# Altium PCB L298N_Motor_Driver.PcbDoc
Units mm, origin at the board's own origin, x right, y up, seen from the top; angles counter-clockwise.
Board outline 47.4 x 55.37 mm, 2 copper layers (Top Layer, Bottom Layer), stack 1.581 mm thick; 21 components, 15 nets, 63 pads, 12 vias.
Unrouted connection lines stored in the file: 11.
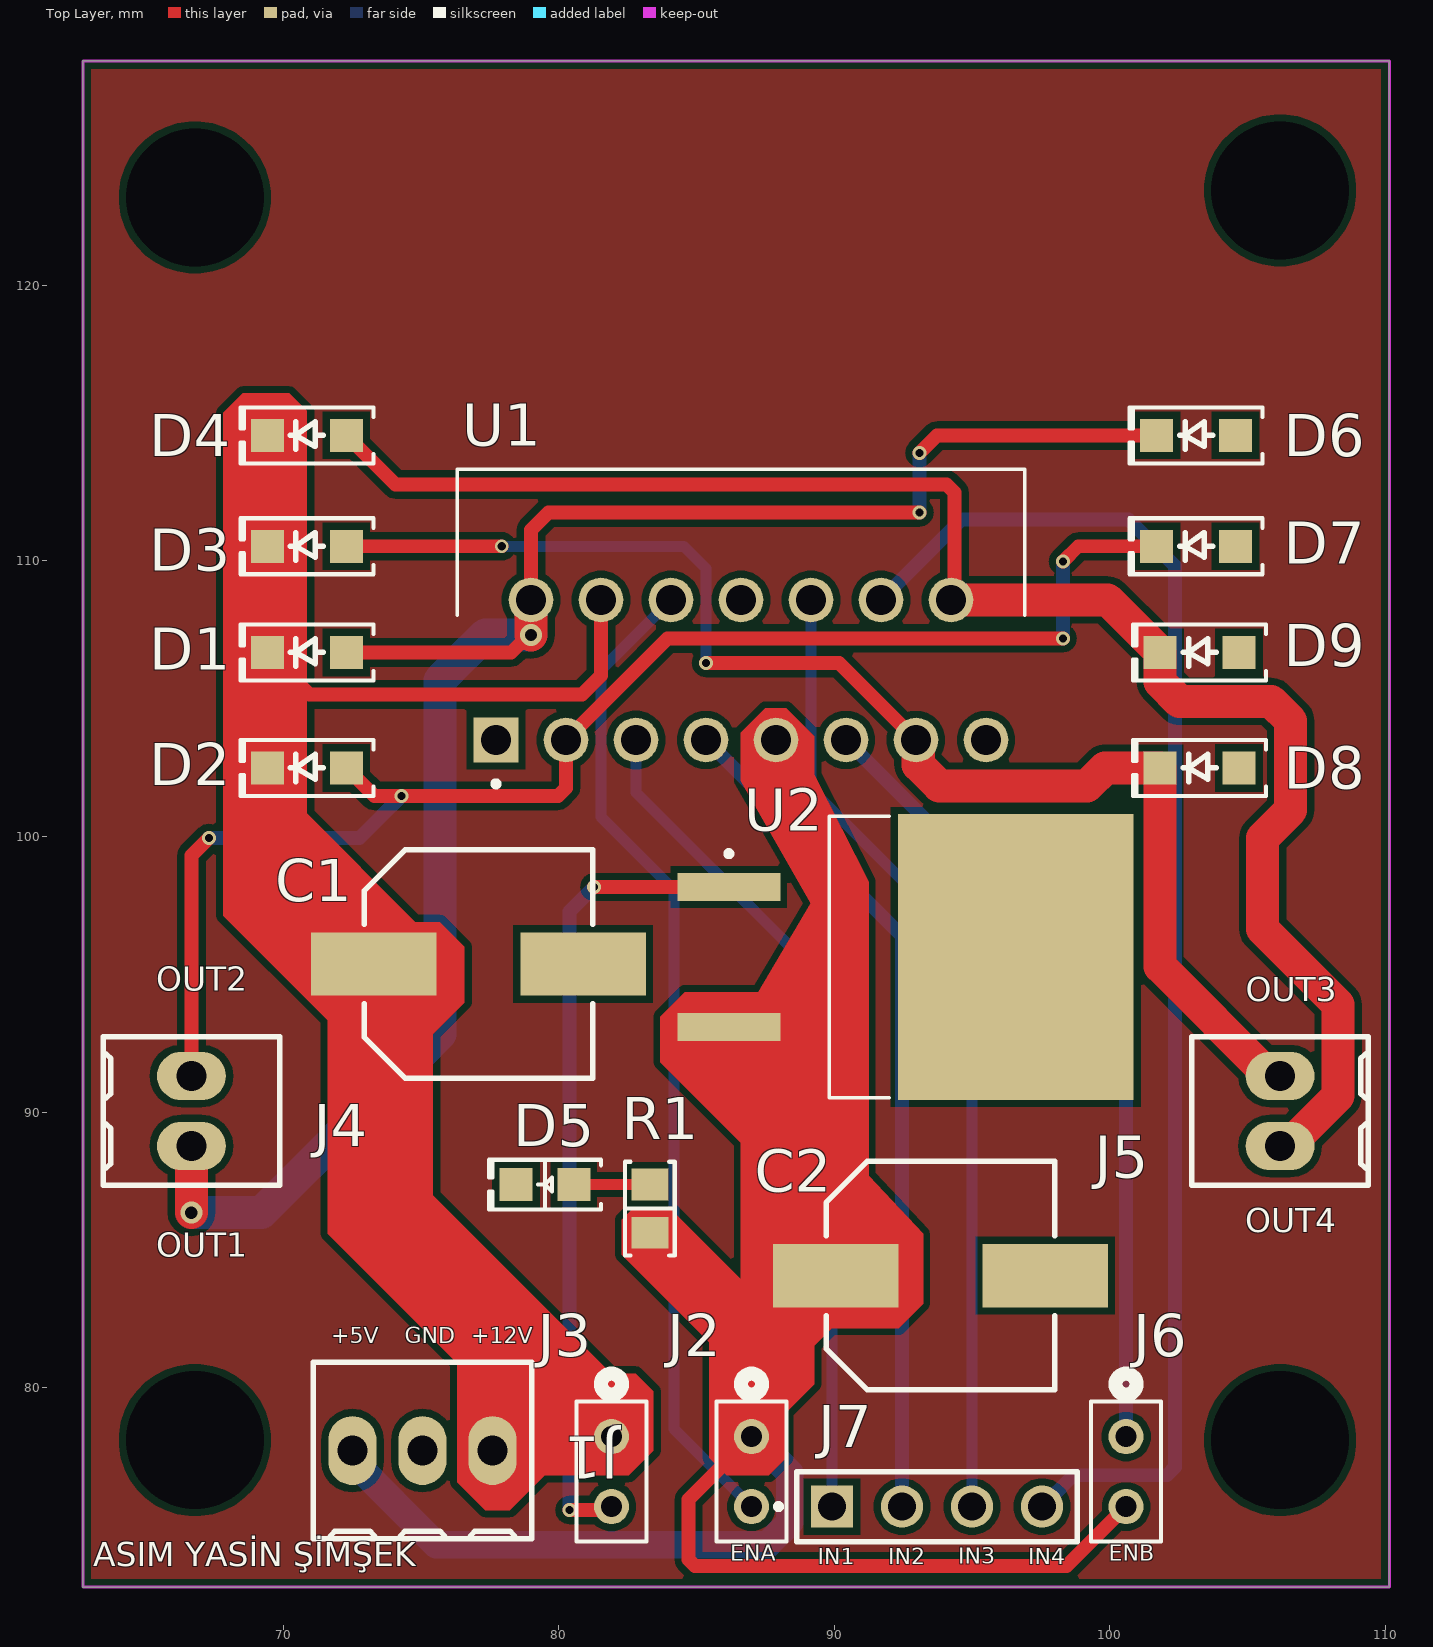
[diagram p0: Top Layer view]
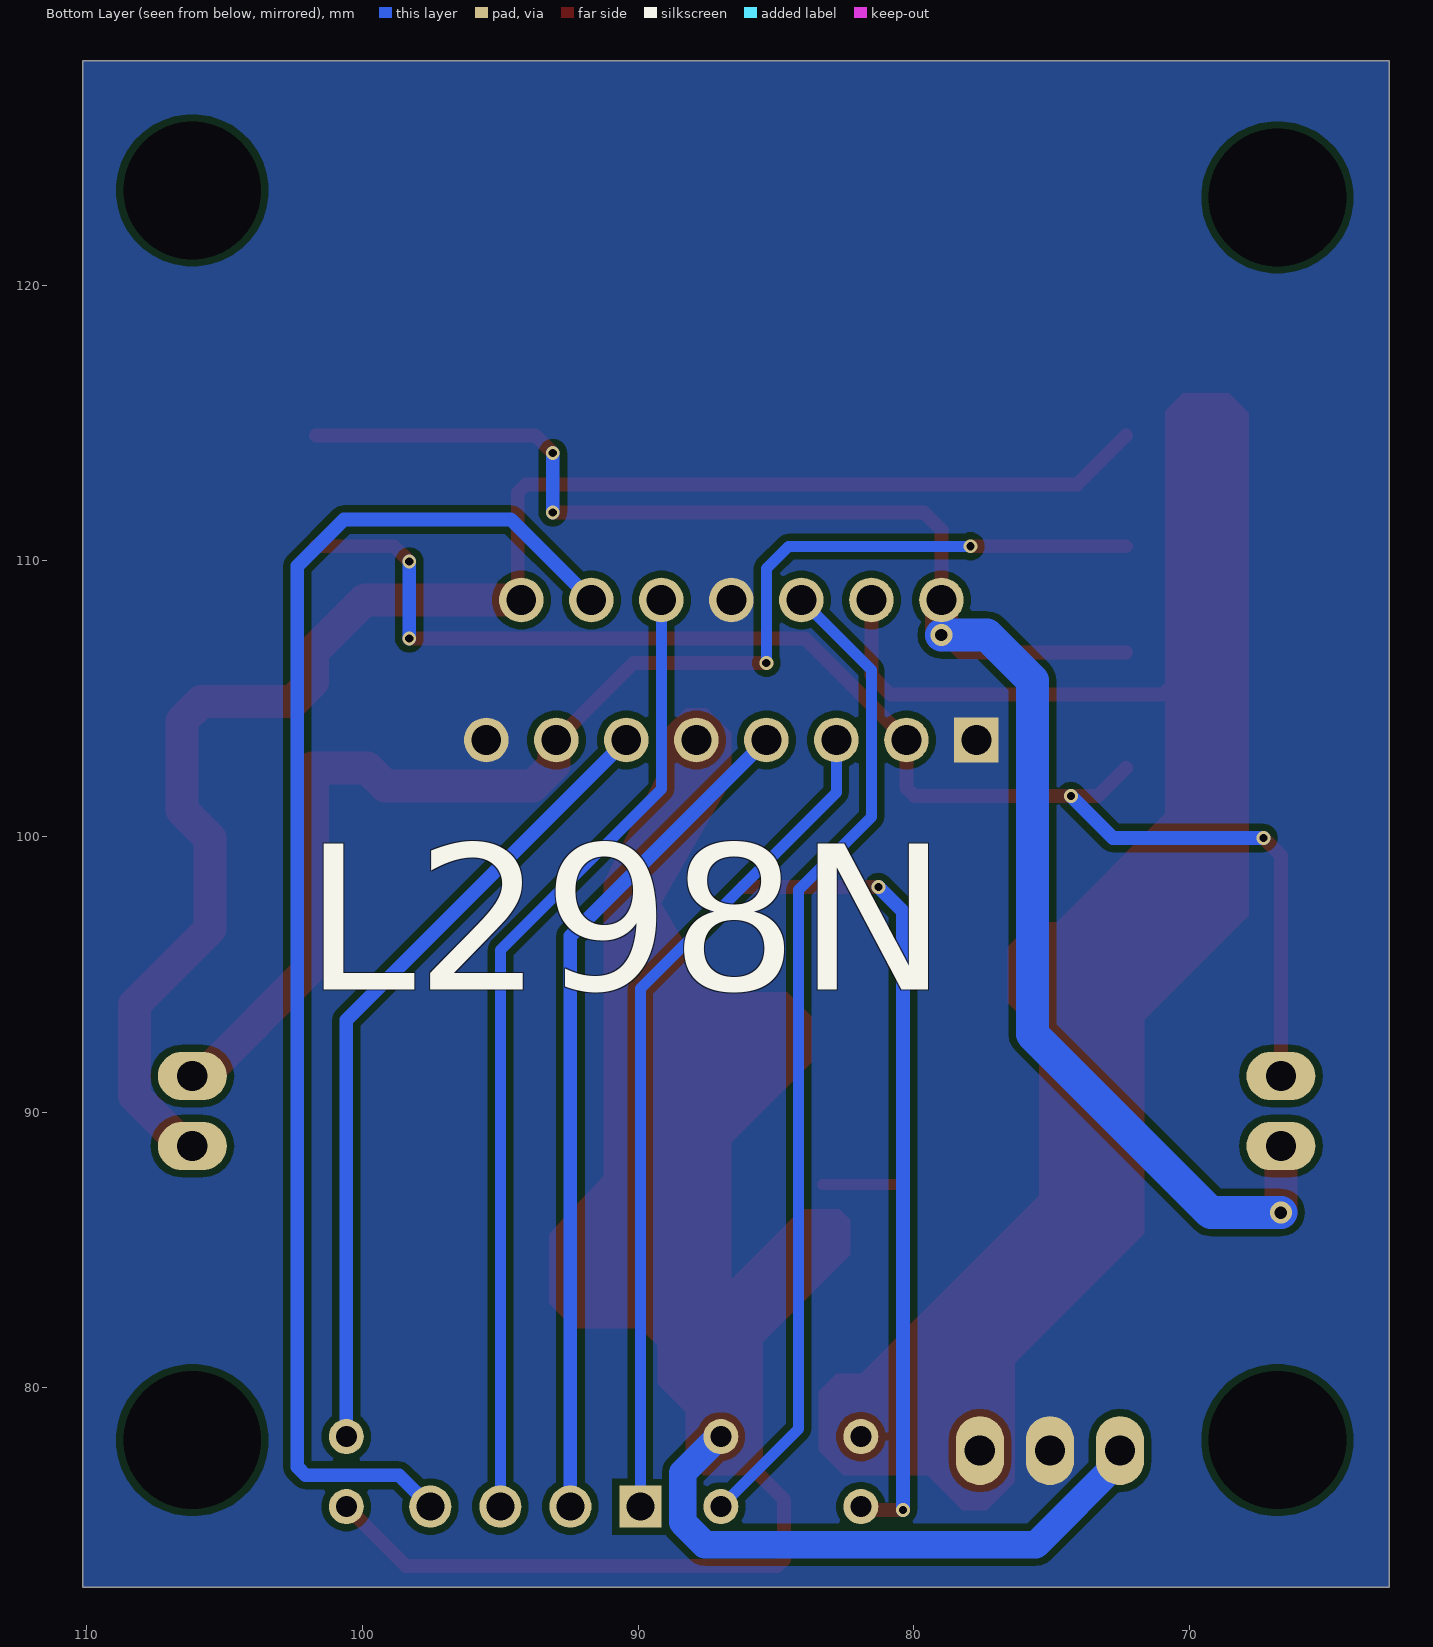
[diagram p1: Bottom Layer view, seen from below]
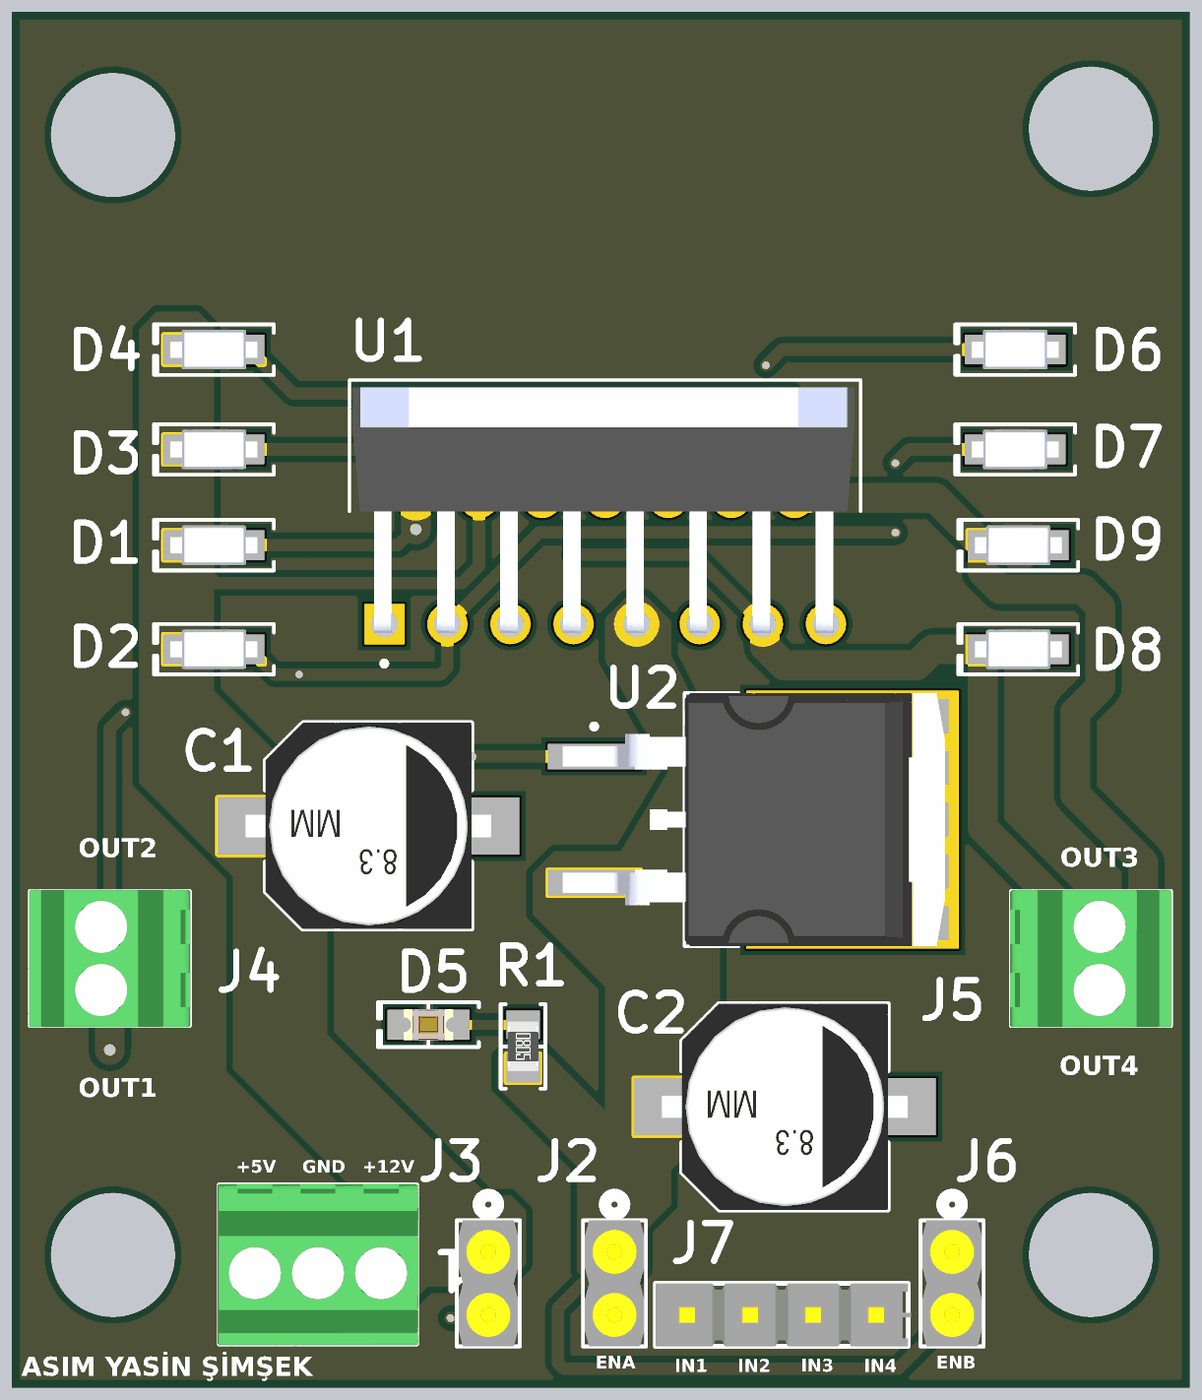
[diagram p2: 3D render of the assembled board from above, using the file's embedded part models]

## Layer stack, top to bottom
Top Solder: solder mask 0.0102, Solder Resist, Dk 3.5
Top Layer: signal copper 0.0356
Dielectric 1: dielectric 1.51, FR-4, Dk 4.8
Bottom Layer: signal copper 0.0356
Bottom Solder: solder mask 0.0102, Solder Resist, Dk 3.5

## Board outline
62.738,72.771 62.738,128.143 110.141,128.143 110.141,72.771

## Design rules (kind name [scope] priority, off if disabled: settings)
Clearance [All] p1: gap=0.254 ignorepadtopadclearanceinfootprint=FALSE except(0: Arc-Hole Track-Hole SMDPad-Hole THPad-Hole Via-Hole Fill-Hole Poly-Hole Region-Hole Text-Hole)
PolygonConnect [All] p1: connectstyle=Direct reliefconductorwidth=0.254 reliefentries=4 polygonreliefangle="90 Angle" airgapwidth=0.254
RoutingVias [All] p1: holewidth=0.5 width=0.8 viastyle="Through Hole" minholewidth=0.3 minwidth=0.5 maxholewidth=1 maxwidth=2
SolderMaskExpansion [All] p1: expansion=0.102 istentingtop=FALSE
Width [All] p1: maxlimit=3 minlimit=0.152 preferedwidth=0.5
30 further rules are at their usual default settings.

## Components (designator, comment, footprint, x,y, rotation, side; value= is the part's Value field where it differs from the comment)
C1 "220µF" "CAP ALSMD 8.3MM H10.5MM" 77.089,95.377 r0 top
C2 "220µF" "CAP ALSMD 8.3MM H10.5MM" 93.853,84.074 r0 top
D1 "1N4007FLTR" SOD123F 70.866,106.68 r180 top
D2 "1N4007FLTR" SOD123F 70.866,102.489 r180 top
D3 "1N4007FLTR" SOD123F 70.866,110.532 r180 top
D4 "1N4007FLTR" SOD123F 70.866,114.554 r180 top
D5 "Red" "LED 0805_2012 RED" 79.502,87.376 r180 top
D6 "1N4007FLTR" SOD123F 103.124,114.554 r180 top
D7 "1N4007FLTR" SOD123F 103.124,110.532 r180 top
D8 "1N4007FLTR" SOD123F 103.251,102.489 r180 top
D9 "1N4007FLTR" SOD123F 103.251,106.68 r180 top
J1 "POWER" "TE 282834-3" 75.057,77.724 r180 top
J2 "ENA" "Header 2 PIN" 86.995,75.692 r180 top
J3 "Header 2 PIN" "Header 2 PIN" 81.915,75.692 r180 top
J4 "MOTOR_A" "TE 282834-2" 66.675,90.043 r90 top
J5 "MOTOR_B" "TE 282834-2" 106.172,90.043 r270 top
J6 "ENB" "Header 2 PIN" 100.584,75.692 r180 top
J7 "Header 4 PIN" "Header 4 PIN" 89.916,75.692 r0 top
R1 "1 kOhms" "RES 0805_2012" 83.312,86.501 r270 top
U1 "L298N" L298N 77.724,103.505 r90 top
U2 "7805" 7805CD2T 92.583,95.631 r0 top

## Footprints (in the part's own frame and the unit in brackets; to place one, negate y for a bottom-side part, rotate by r counter-clockwise, add the part's x,y. Pads: shape width x height; smd on the part's side, far side on the other; paste and mask are expansions set on the pad)
7805CD2T [mm] "Voltage Reg"
  rect 3.74x1.02 smd: 1(-6.41,2.54) 2(-6.41,-2.54)
  rect 8.56x10.37 smd paste-6: 3(4,0)
  silkscreen extent -6.51,-5.1 -0.59,5.1, body extent -7.71,-5.1 7.71,5.1, height 4.6
"CAP ALSMD 8.3MM H10.5MM" [mm] "Aluminum Electrolytic Capacitor, Body 8.30x8.30x10.50mm, IPC Low Density"
  rect 4.55x2.3 smd: 1(-3.8,0) 2(3.8,0)
  silkscreen extent -4.15,-4.15 4.15,4.15, body extent -4.95,-4.15 4.95,4.15, height 10.5
"Header 2 PIN" [mil]
  round 50 hole 30: 1(0,-100) 2(0,0)
  silkscreen extent -50,-190 50,50, body extent -47,-150 47,50, height 326
"Header 4 PIN" [mm]
  rect 1.53x1.53 / inner round 1.53 / far side rect 1.53x1.53 hole 1.02: 1(0,0)
  round 1.53 hole 1.02: 2(2.54,0) 3(5.08,0) 4(7.62,0)
  silkscreen extent -2.04,-1.27 8.89,1.27, body extent -1.27,-1.27 9.02,1.27, height 8.38
L298N [mm] "Motor Driver"
  rect 1.62x1.62 hole 1.08: 1(0,0)
  round 1.62 hole 1.08: 2(5.08,-1.27) 3(0,-2.54) 4(5.08,-3.81) 5(0,-5.08) 6(5.08,-6.35) 7(0,-7.62) 8(5.08,-8.89) 9(0,-10.16) 10(5.08,-11.43) 11(0,-12.7) 12(5.08,-13.97) 13(0,-15.24) 14(5.08,-16.51) 15(0,-17.78)
  silkscreen extent -1.69,-19.18 9.83,1.4, body extent -0.36,-18.93 9.53,1.27, height 20.55
"LED 0805_2012 RED" [mm] "Chip Diode, 2-Leads, Body 2.00x1.25mm, IPC Medium Density"
  rect 1.2x1.2 smd: 1(-1.05,0) 2(1.05,0)
  silkscreen extent -2.03,-0.9 2.03,0.9, body extent -1,-0.62 1,0.63, height 0.9
"RES 0805_2012" [mm] "Chip Resistor, 2-Leads, Body 2.00x1.25mm, IPC Medium Density"
  rect 1.15x1.35 smd: 1(-0.875,0) 2(0.875,0)
  silkscreen extent -1.7,-0.9 1.7,0.9, body extent -1,-0.62 1,0.63, height 0.6
SOD123F [mm] "SODFL, 2-Leads, Body 1.60x3.50mm, IPC Medium Density"
  rect 1.2x1.2 smd: 1(-1.43,0) 2(1.43,0)
  silkscreen extent -2.41,-1.02 2.41,1.02, body extent -1.75,-0.8 1.75,0.8, height 1.1
"TE 282834-2" [mm]
  oval 1.75x2.5 hole 1.1: 1(-1.27,0) 2(1.27,0)
  silkscreen extent -2.7,-3.2 2.7,3.2, body extent -2.77,-3.25 2.77,3.25, height 10
"TE 282834-3" [mm]
  oval 1.75x2.5 hole 1.1: 1(-2.54,0) 2(0,0) 3(2.54,0)
  silkscreen extent -3.97,-3.2 3.97,3.2, body extent -4.04,-3.25 4.04,3.25, height 10

## Part data
C1 C2: library part UUR1V221MNL6GS, "CAP ALUM 220UF 20% 35V SMD", Device Package="Radial, Can - SMD", Lifetime @ Temp.="2000 Hrs @ 85°C", manufacturer=Nichicon, Operating Temperature="-40°C ~ 85°C", Ripple Current @ High Frequency="319.8mA @ 10kHz", Ripple Current @ Low Frequency="246mA @ 120Hz", Supplier Part Number 1=493-6238-1-ND, Tolerance=±20%, Voltage - Rated=35V, Applications="General Purpose", Capacitance=220µF, componentlink1description=Datasheet, componentlink1url=http://nichicon-us.com/english/products/pdfs/e-uur.pdf, componentlink2description="DigiKey Link", componentlink2url=http://digikey.com/product-detail/en/nichicon/UUR1V221MNL6GS/493-6238-1-ND/3438751, Height - Seated (Max)="0.413\" (10.50mm)", lastupdated="2.09.2020 01:25:15", Lifecycle Status=Active, Minimum Order=1, Mounting Type="Surface Mount", Package / Case="Radial, Can - SMD", packaging=TapeAndReel, Part Number=UUR1V221MNL6GS, Part Status=Active, partid=7568, price=0.20, series=UUR, Size / Dimension="0.315\" Dia (8.00mm)", Supplier 1=DigiKey, Surface Mount Land Size="0.327\" L x 0.327\" W (8.30mm x 8.30mm)"
D1 D2 D3 D4 D6 D7 D8 D9: "STANDARD RECTIFIER 1000V SOD-123", Capacitance @ Vr, F="15pF @ 4V, 1MHz", Current - Average Rectified (Io)=1A, Current - Reverse Leakage @ Vr="5µA @ 1000V", manufacturer="SMC Diode Solutions", Package / Case=SOD-123F, Supplier Device Package=SOD-123FL, Supplier Part Number 1=1655-1N4007FLCT-ND, Voltage - DC Reverse (Vr) (Max)=1000V, Voltage - Forward (Vf) (Max) @ If="1.1V @ 1A", componentlink1description=Datasheet, componentlink1url=http://www.smc-diodes.com/propdf/1N4001FL-1N4007FL%20N1646%20REV.A.pdf, componentlink2description="DigiKey Link", componentlink2url=http://digikey.com/product-detail/en/smc-diode-solutions/1N4007FLTR/1655-1N4007FLCT-ND/11657827, Diode Type=Standard, lastupdated="30.08.2020 20:59:55", Lifecycle Status=Active, Minimum Order=1, Mounting Type="Surface Mount", packaging=TapeAndReel, Part Number=1N4007FLTR, partid=3314, price=0.01, Speed="Standard Recovery >500ns, > 200mA (Io)", Supplier 1=DigiKey
D5: library part XZMDK54W-4, "LED RED CLEAR 0805 SMD", Current - Test=20mA, Device Package="0805 (2012 Metric)", Lens Color=Colorless, manufacturer=SunLED, Millicandela Rating=228mcd, Supplier Device Package=0805, Supplier Part Number 1=1497-XZMDK54W-4CT-ND, Voltage - Forward (Vf) (Typ)=1.95V, Color=Red, componentlink1description=Datasheet, componentlink1url=https://www.sunledusa.com/products/spec/XZMDK54W-4.pdf, componentlink2description="DigiKey Link", componentlink2url=https://www.digikey.com/en/products/detail/sunled/XZMDK54W-4/13559300, Height (Max)=0.50mm, lastupdated="3.06.2024 20:00:05", Lens Size="1.30mm x 1.25mm", Lens Style="Rectangle with Flat Top", Lens Transparency=Clear, Lifecycle Status=Active, Minimum Order=1, Mounting Type="Surface Mount", Package / Case="0805 (2012 Metric)", packaging=TapeAndReel, Part Number=XZMDK54W-4, Part Status=Active, partid=1067, price=0.05, series=-, Size / Dimension="2.00mm L x 1.25mm W", Supplier 1=DigiKey, Viewing Angle=140°, Wavelength - Dominant=630nm, Wavelength - Peak=645nm
J1: library part 282834-3, "TERM BLK 3P SIDE ENT 2.54MM PCB", Color=Green, Current=10A, manufacturer="TE Connectivity AMP Connectors", Supplier Part Number 1=A98334-ND, Voltage=150V, componentlink1description=Datasheet, componentlink1url=https://www.te.com/commerce/DocumentDelivery/DDEController?Action=srchrtrv&DocNm=282834&DocType=Customer+Drawing&DocLang=English, componentlink2description="DigiKey Link", componentlink2url=http://digikey.com/product-detail/en/te-connectivity-amp-connectors/282834-3/A98334-ND/1153264, lastupdated="15.01.2020 04:15:50", Lifecycle Status=Active, Mating Orientation="Horizontal with Board", Minimum Order=1, Mounting Type="Through Hole", Number of Levels=1, packaging=Bulk, Part Number=282834-3, Part Status=Active, Pitch="0.100\" (2.54mm)", Positions Per Level=3, price=2.01, series=Buchanan, Supplier 1=DigiKey, Wire Gauge="16-30 AWG", Wire Termination="Screw - Rising Cage Clamp"
J2 J6: library part "Header 2 PIN"
J4 J5: library part 282834-2, "TERM BLK 2P SIDE ENT 2.54MM PCB", Color=Green, Current=10A, manufacturer="TE Connectivity AMP Connectors", Supplier Part Number 1=A98333-ND, Voltage=150V, componentlink1description=Datasheet, componentlink1url=https://www.te.com/commerce/DocumentDelivery/DDEController?Action=srchrtrv&DocNm=282834&DocType=Customer+Drawing&DocLang=English, componentlink2description="DigiKey Link", componentlink2url=http://digikey.com/product-detail/en/te-connectivity-amp-connectors/282834-2/A98333-ND/1150135, lastupdated="15.01.2020 04:15:38", Lifecycle Status=Active, Mating Orientation="Horizontal with Board", Minimum Order=1, Mounting Type="Through Hole", Number of Levels=1, packaging=Bulk, Part Number=282834-2, Part Status=Active, Pitch="0.100\" (2.54mm)", Positions Per Level=2, price=0.88, series=Buchanan, Supplier 1=DigiKey, Wire Gauge="16-30 AWG", Wire Termination="Screw - Rising Cage Clamp"
R1: library part Y40821K00000T9W, "RES SMD 1K OHM 0.01% 1/5W 0805", Device Package="0805 (2012 Metric)", manufacturer="Vishay Foil Resistors (Division of Vishay Precision Group)", Operating Temperature="-55°C ~ 225°C", Power (Watts)="0.2W, 1/5W", Supplier Device Package=0805, Supplier Part Number 1=804-1156-ND, Temperature Coefficient=±2.5ppm/°C, Tolerance=±0.01%, componentlink1description=Datasheet, componentlink1url=http://www.vishaypg.com/docs/63263/FRSG-Series.pdf, componentlink2description="DigiKey Link", componentlink2url=https://www.digikey.com/en/products/detail/vishay-foil-resistors-division-of-vishay-precision-group/Y40821K00000T9W/6561129, Composition="Metal Foil", Features="Moisture Resistant, Non-Inductive", Height - Seated (Max)="0.025\" (0.64mm)", lastupdated="8.02.2024 21:02:07", Lifecycle Status=Active, Minimum Order=1, Number of Terminations=2, Package / Case="0805 (2012 Metric)", packaging=Tray, Part Number=Y40821K00000T9W, Part Status=Active, partid=34938, price=15.78, Resistance="1 kOhms", series=FRSG, Size / Dimension="0.080\" L x 0.050\" W (2.03mm x 1.27mm)", Supplier 1=DigiKey
U1: "Motor Driver"
U2: "Voltage Reg."

## Free pads (board coordinates)
  round 4 hole 5 unplated mask+0.05: ""(66.802,78.105) ""(66.802,123.19) ""(106.172,78.105) ""(106.172,123.444)

## Via types
v1: diameter 0.5, hole 0.3, Top Layer to Bottom Layer, tented both sides, 10 vias
v2: diameter 0.8, hole 0.45, Top Layer to Bottom Layer, tented both sides, 2 vias

## Nets (pads, with @x,y where several pads share a name; then routed paths per layer and width w, separated by ;. In a path a pad name is that pad's centre, name@x,y a point inside that pad or via, vN(x,y) a via of type N, cw(c..) or ccw(c..) an arc to the next point about the centre after c; other vN are vias at no path point)
GND: C1.2 C2.2 D5.2 D6.1 D7.1 D8.1 D9.1 J1.2 U1.1 U1.8 U1.15 U2.3
NetC1_1: C1.1 D1.2 D2.2 D3.2 D4.2 J1.1 J3.1 U1.4 | length 15.8
  Top Layer w0.5: D1.2 70.96,105.156 80.849,105.156 81.534,105.841 U1.4
NetC2_1: C2.1 J1.3 J2.1 J6.2 R1.2 U1.9 U2.2 | length 43.9
  Top Layer w0.5: J2.1 84.709,75.946 84.709,73.767 84.943,73.533 98.425,73.533 J6.2
  Bottom Layer w1: J1.3 72.517,77.349 75.563,74.303 87.57,74.303 88.384,75.117 88.384,76.916 87.068,78.232 J2.1
NetD1_1: D1.1 D6.2 J4.1 U1.2 | length 67.1
  Top Layer w0.5: D1.1 78.278,106.68 78.913,107.315 v2(78.994,107.315) ; U1.2 78.994,111.125 79.629,111.76 v1(93.091,111.76) ; v1(93.091,113.919) 93.726,114.554 D6.2
  Top Layer w1.2: v2(66.675,86.36) J4.1 ; v2(78.994,107.315) U1.2
  Bottom Layer w0.5: v1(93.091,111.76) v1(93.091,113.919)
  Bottom Layer w1.2: v2(66.675,86.36) 69.215,86.36 75.692,92.837 75.692,105.664 77.343,107.315 v2(78.994,107.315)
NetD2_1: D2.1 D7.2 J4.2 U1.3 | length 52.7
  Top Layer w0.5: J4.2 66.675,99.314 v1(67.31,99.949) ; D2.1 73.312,101.473 v1(74.295,101.473) 79.971,101.473 80.264,101.766 U1.3 83.947,107.188 v1(98.298,107.188) ; v1(98.298,109.982) 98.848,110.532 D7.2
  Bottom Layer w0.5: v1(67.31,99.949) 72.771,99.949 v1(74.295,101.473) ; v1(98.298,107.188) v1(98.298,109.982)
NetD3_1: D3.1 D8.2 J5.1 U1.13 | length 49.1
  Top Layer w0.5: D3.1 v1(77.936,110.532) ; v1(85.344,106.299) 90.17,106.299 U1.13
  Top Layer w1.2: U1.13 93.044,103.425 93.044,102.604 93.807,101.841 99.174,101.841 99.822,102.489 D8.2 101.821,95.289 105.797,91.313 J5.1
  Bottom Layer w0.4: v1(77.936,110.532) 84.54,110.532 85.344,109.728 v1(85.344,106.299)
NetD4_1: D4.1 D9.2 J5.2 U1.14 | length 59.7
  Top Layer w0.5: D4.1 74.074,112.776 94.068,112.776 94.361,112.483 94.361,108.712 U1.14
  Top Layer w1.2: U1.14 99.916,108.585 D9.2 101.821,105.605 102.524,104.902 105.85,104.902 106.553,104.199 106.553,100.965 105.537,99.949 105.537,96.642 108.276,93.903 108.276,90.597 106.452,88.773 J5.2
NetD5_1: D5.1 R1.1 | length 2.8
  Top Layer w0.4: D5.1 R1.1
NetJ2_2: J2.2 U1.6 | length 36.2
  Bottom Layer w0.4: U1.6 81.534,106.045 81.534,100.711 84.181,98.064 84.181,78.506 J2.2
NetJ3_2: J3.2 U2.1 | length 29.4
  Top Layer w0.5: v1(80.391,75.565) 81.788,75.565 J3.2 ; v1(81.28,98.171) U2.1
  Bottom Layer w0.5: v1(80.391,75.565) 80.391,97.282 v1(81.28,98.171)
NetJ6_1: J6.1 U1.11 | length 29.5
  Bottom Layer w0.5: U1.11 100.584,93.345 J6.1
NetJ7_1: J7.1 U1.5 | length 30.8
  Bottom Layer w0.4: U1.5 82.804,101.6 89.916,94.488 J7.1
NetJ7_2: J7.2 U1.7 | length 30.8
  Bottom Layer w0.5: U1.7 92.456,96.393 J7.2
NetJ7_3: J7.3 U1.10 | length 35.3
  Bottom Layer w0.4: U1.10 89.154,101.727 94.996,95.885 J7.3
NetJ7_4: J7.4 U1.12 | length 50.7
  Bottom Layer w0.5: U1.12 94.615,111.506 100.672,111.506 102.362,109.816 102.362,77.128 102.065,76.831 98.675,76.831 J7.4

## Polygon pours and split planes (outlines as drawn)
GND on Bottom Layer "GND_L02_P000" (solid, pour order 0): 62.738,128.143 110.141,128.143 110.141,72.771 62.738,72.771
no net on Top Layer "NONET_L01_P002" (solid, pour order 2): 62.738,128.143 110.141,128.143 110.141,72.771 62.738,72.771

## Keep-outs
Top Layer:
  lines w0.1: 62.738,72.771 110.141,72.771 110.141,128.143 62.738,128.143 62.738,93.345 62.738,72.771

## Other copper
Top Layer:
  region net NetC2_1: 82.296,86.106 82.677,86.487 84.074,86.487 86.614,83.947 86.614,79.883 85.471,78.74 85.471,81.661 82.296,84.836
  region net NetC2_1: 87.503,104.648 86.614,103.759 86.614,102.019 89.149,97.576 87.244,94.361 84.582,94.361 83.693,93.472 83.693,91.821 86.614,88.9 86.614,79.883 85.471,78.74 85.471,77.47 86.106,76.835 87.63,76.835 88.265,77.47 88.265,79.121 89.281,80.137 89.281,81.534 89.916,82.169 92.329,82.169 93.218,83.058 93.218,85.598 91.247,87.696 91.247,98.364 89.281,102.235 89.281,103.632 88.265,104.648
  region net NetC1_1: 68.542,116.078 70.231,116.078 70.866,115.443 70.866,100.838 74.803,96.901 75.692,96.901 76.581,96.012 76.581,93.98 75.438,92.837 75.438,86.995 81.915,80.518 82.804,80.518 83.439,79.883 83.439,77.724 82.55,76.835 79.502,76.835 78.232,75.565 77.343,75.565 76.327,76.581 76.327,80.899 71.628,85.598 71.628,93.345 67.837,97.136 67.837,115.373

## Silkscreen, mask and mechanical layers (free items; w line width, h text height)
Top Overlay:
  text "OUT2" at 65.405,94.12 h1.5
  text "OUT3" at 104.93,93.739 h1.5
  text "OUT4" at 104.902,85.357 h1.5
  text "OUT1" at 65.405,84.468 h1.5
  text "+5V" at 71.755,81.422 h1
  text "GND" at 74.422,81.416 h1
  text "+12V" at 76.835,81.415 h1
  text "ENA" at 86.233,73.535 h1
  text "ENB" at 99.949,73.535 h1
  text "IN1" at 89.408,73.408 h1
  text "IN2" at 91.948,73.408 h1
  text "IN3" at 94.488,73.415 h1
  text "IN4" at 97.028,73.408 h1
  text "ASIM YASİN ŞİMŞEK" at 63.118,73.244 h1.5
Bottom Overlay:
  text "L298N" at 102.108,91.572 h15